# Altium PCB EJ1Mealy.PcbDoc
Units mm, origin at the board's own origin, x right, y up, seen from the top; angles counter-clockwise.
Board outline 100 x 100 mm, 2 copper layers (Top Layer, Bottom Layer); 20 components, 21 nets, 144 pads, 40 vias.
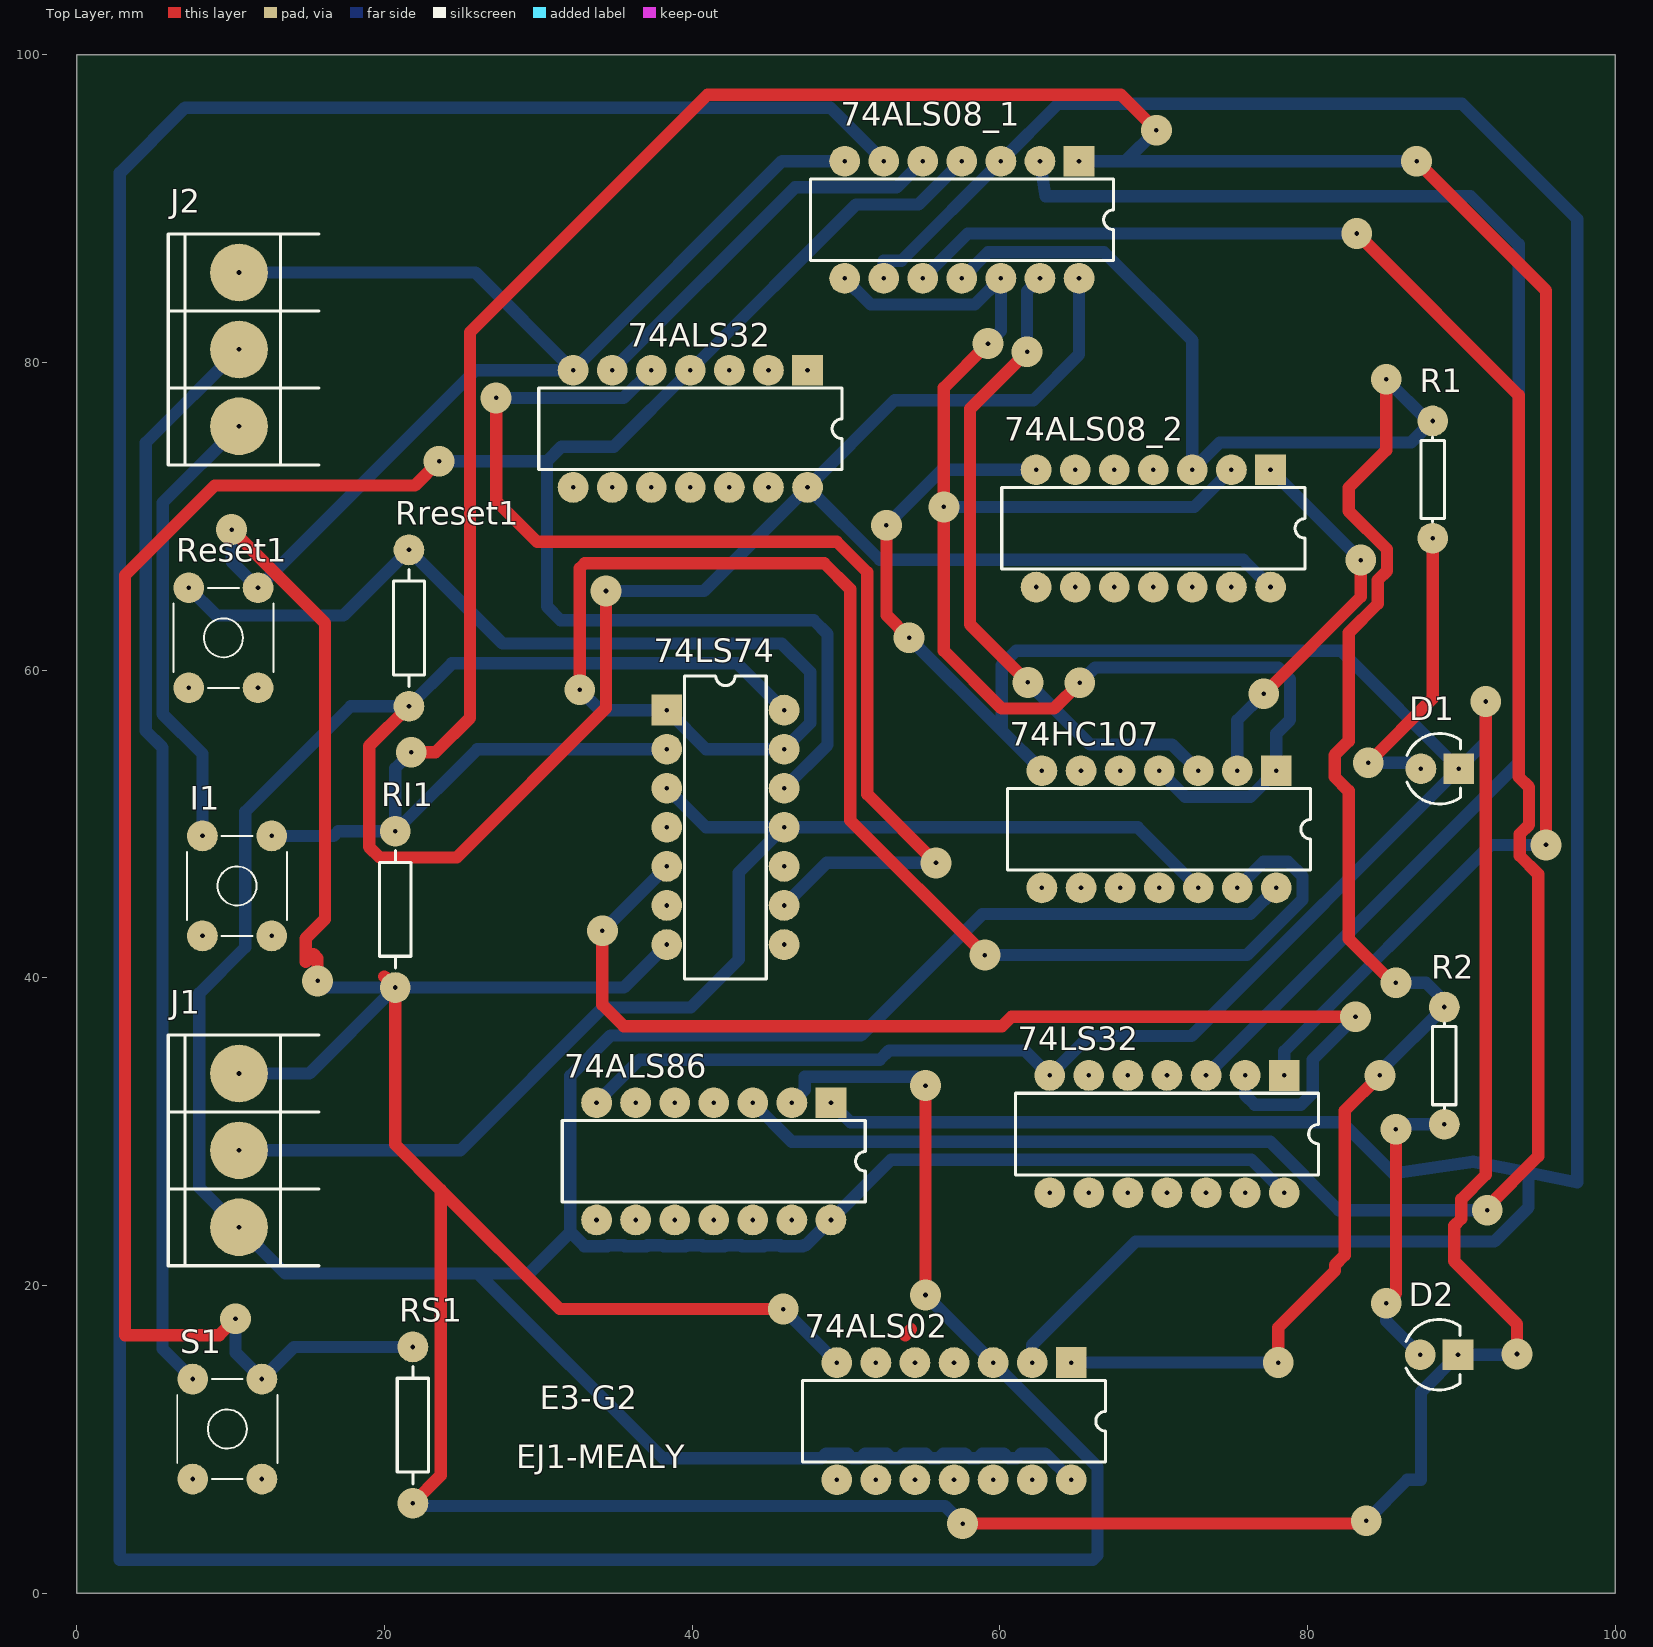
[diagram p0: Top Layer view]
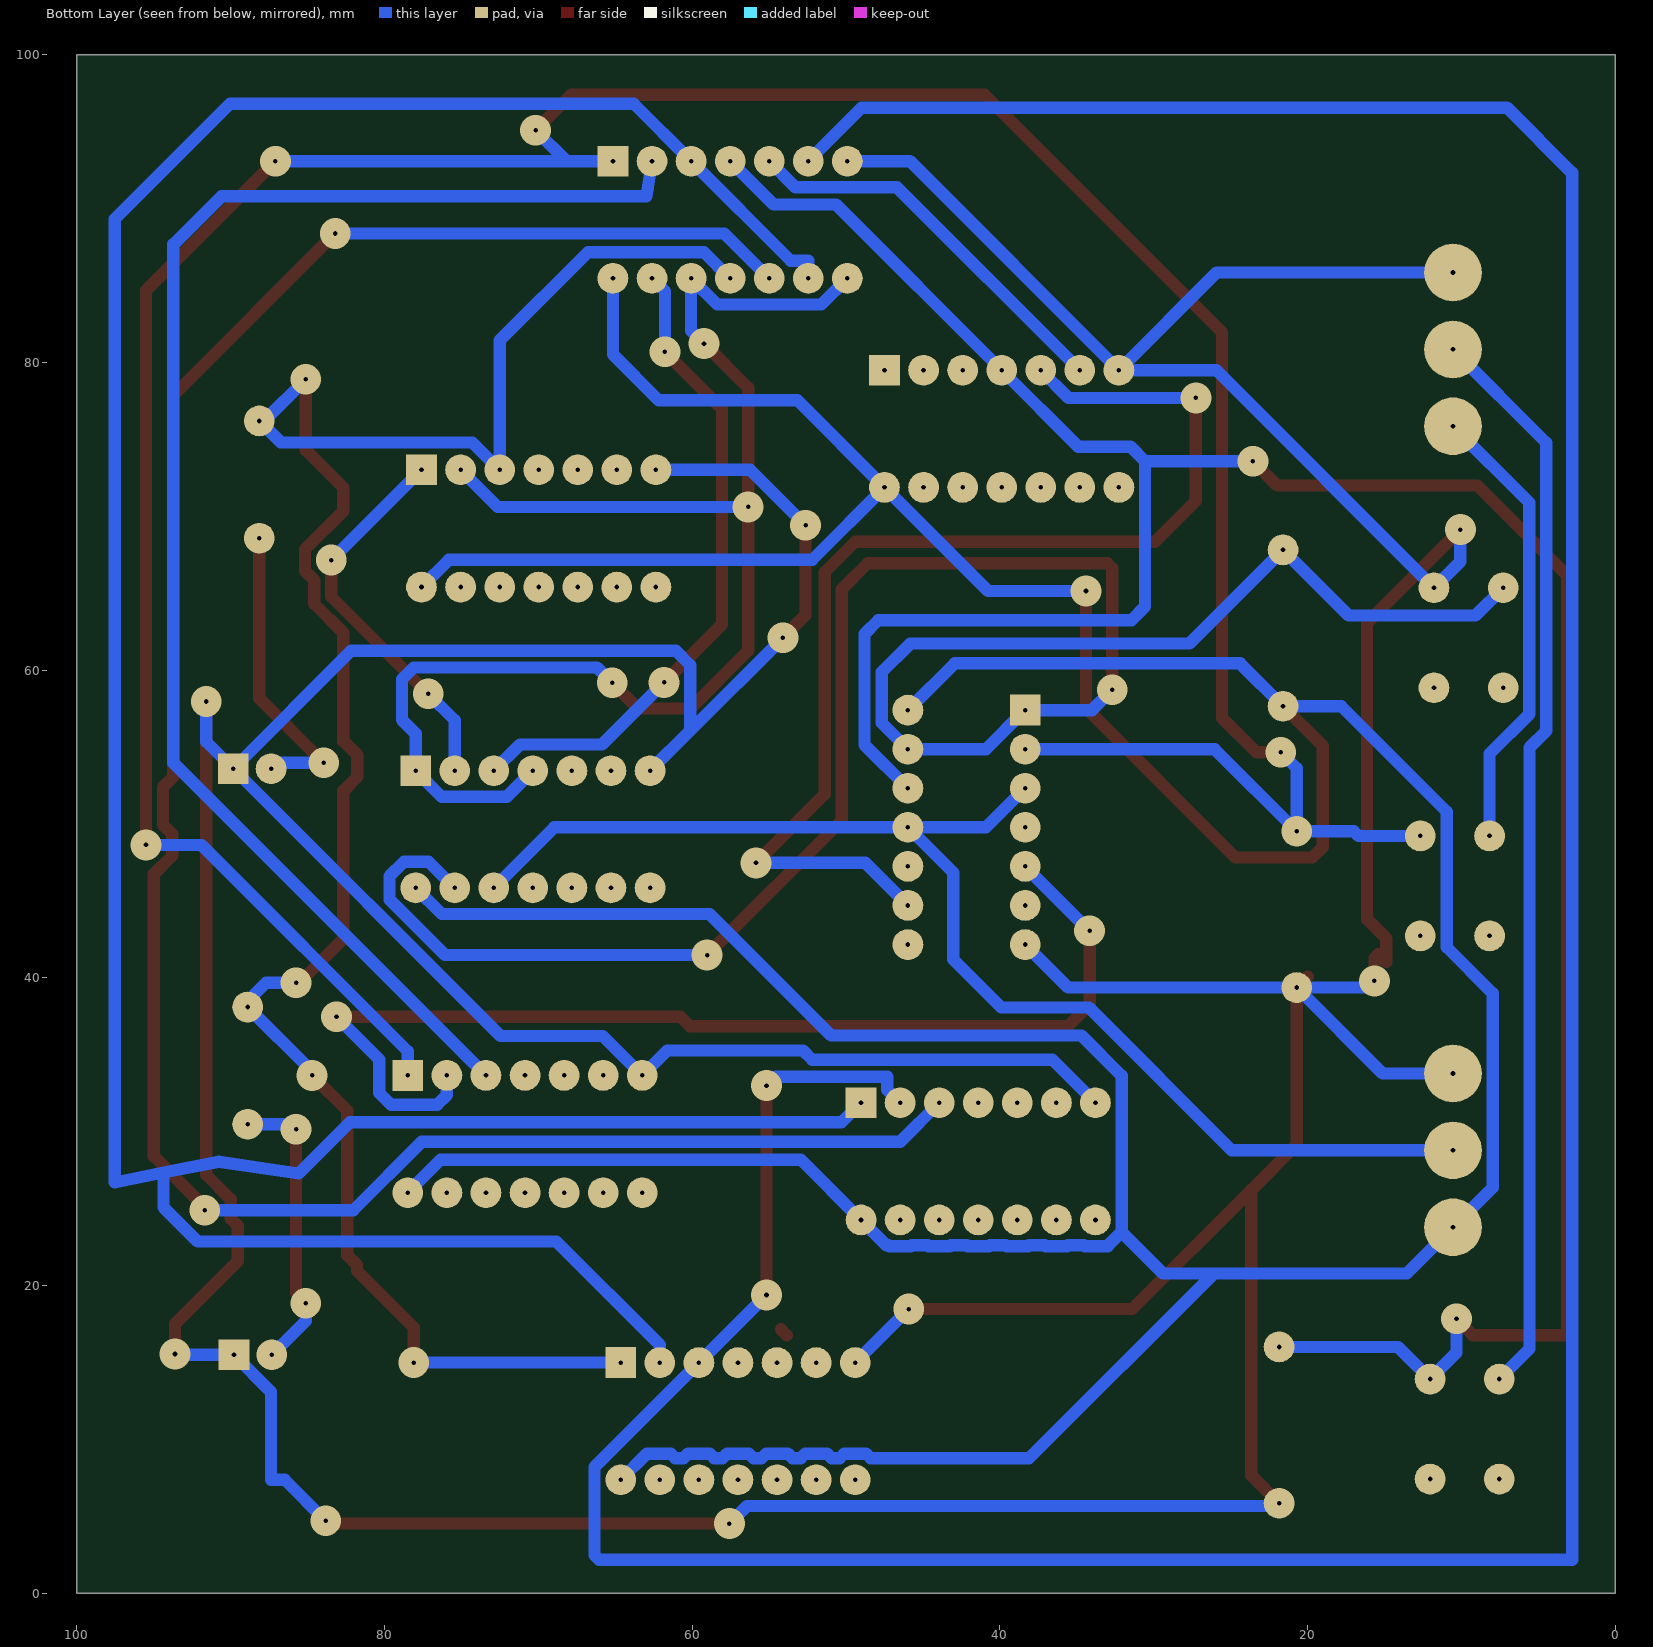
[diagram p1: Bottom Layer view, seen from below]
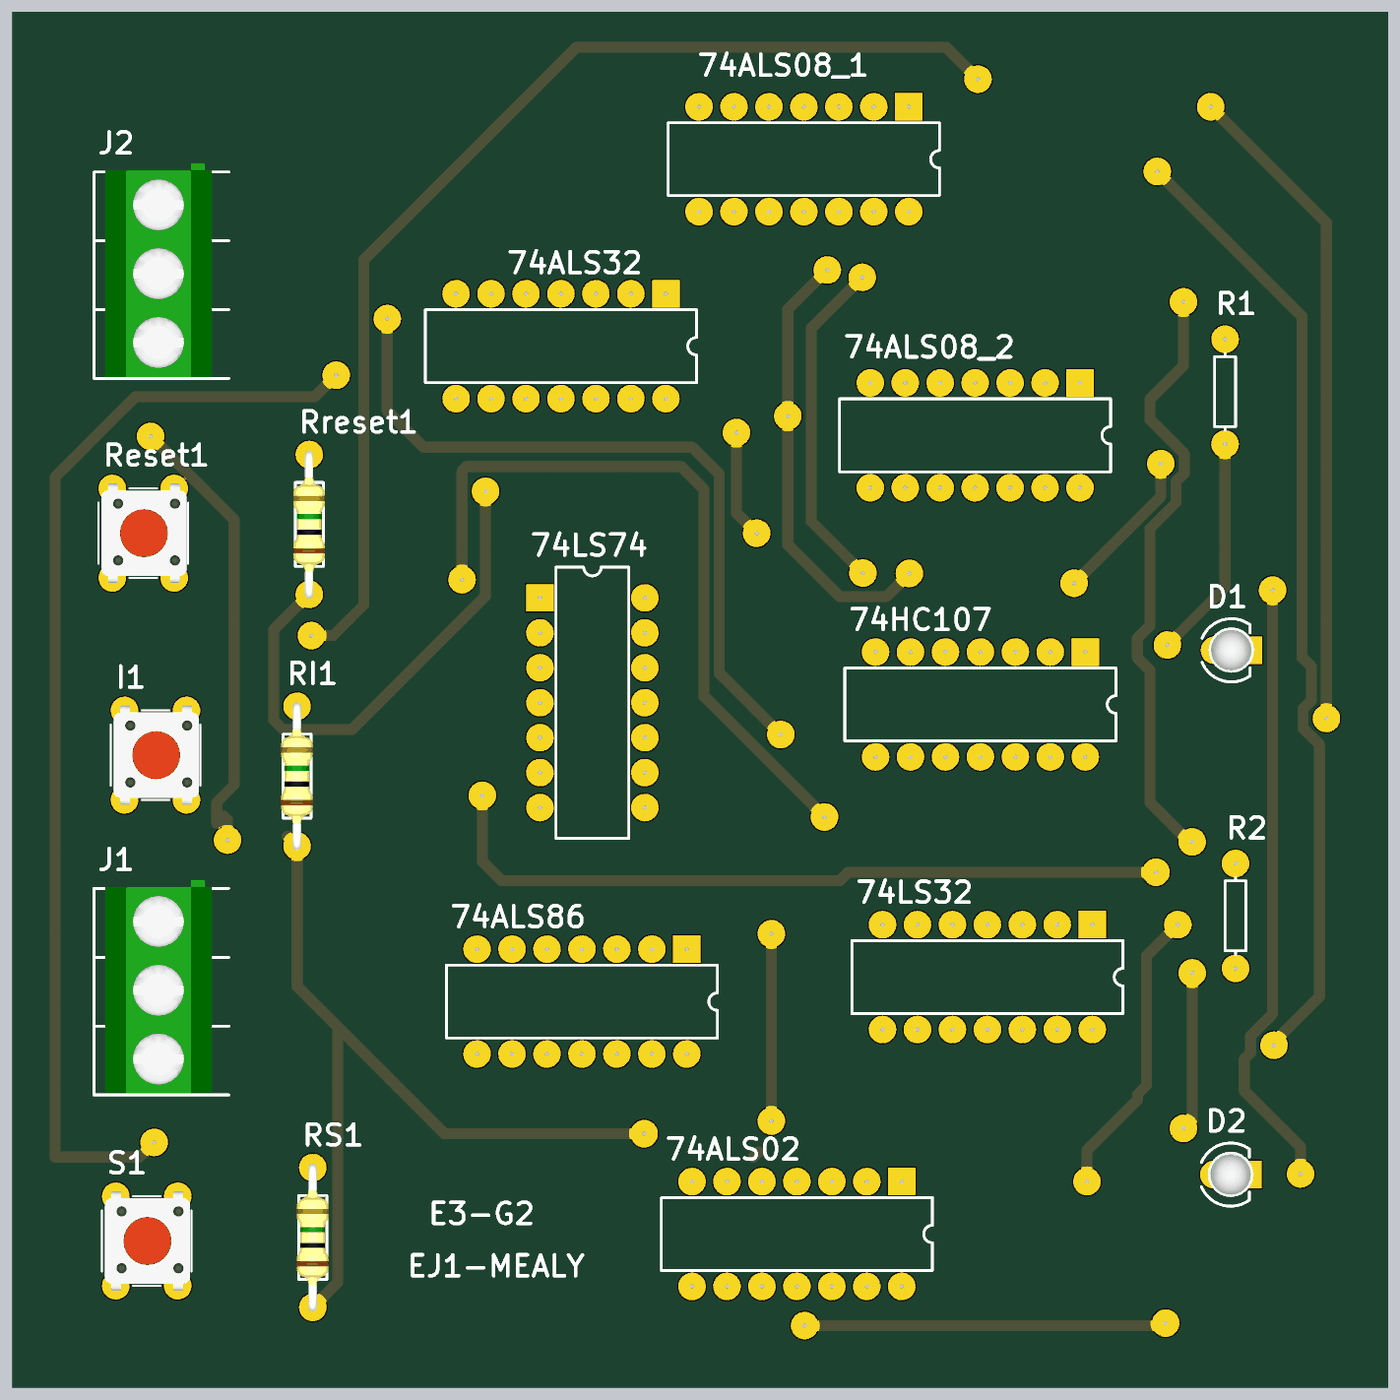
[diagram p2: 3D render of the assembled board from above, using the file's embedded part models]

## Layer stack, top to bottom
Top Solder: solder mask 0.0102, Solder Resist, Dk 3.5
Top Layer: signal copper 0.0356
Dielectric 1: dielectric 0.32, FR-4, Dk 4.8
Bottom Layer: signal copper 0.0356
Bottom Solder: solder mask 0.0102, Solder Resist, Dk 3.5

## Board outline
100,100 0,100 0,0 100,0

## Design rules (kind name [scope] priority, off if disabled: settings)
Clearance [All] p1: gap=0.3 ignorepadtopadclearanceinfootprint=FALSE
PolygonConnect [All] p1: connectstyle=Relief reliefconductorwidth=0.254 reliefentries=4 polygonreliefangle="90 Angle" airgapwidth=0.254
RoutingVias [All] p1: holewidth=0.3 width=2 viastyle="Through Hole" minholewidth=0.3 minwidth=2 maxholewidth=0.3 maxwidth=2
SolderMaskExpansion [All] p1: expansion=0.102
Width [All] p1: maxlimit=1 minlimit=0.5 preferedwidth=0.8
30 further rules are at their usual default settings.

## Classes and differential pairs
component class EJ1Mealy: 74ALS08_2 74ALS32 74HC107 74LS32 74LS74 D1 D2 I1 J1 J2 R1 R2 Reset1 RI1 Rreset1 RS1 S1

## Components (designator, comment, footprint, x,y, rotation, side; value= is the part's Value field where it differs from the comment)
74ALS02 "SN74ALS02AN" N014 57.023,11.176 r180 top
74ALS08_1 "SN74ALS08N" N014 57.531,89.281 r180 top
74ALS08_2 "SN74ALS08N" N014 69.977,69.215 r180 top
74ALS32 "SN74ALS32N" N014 39.878,75.692 r180 top
74ALS86 "SN74ALS86N" N014 41.402,28.067 r180 top
74HC107 "SN74HC107N" N014D 70.358,49.657 r180 top
74LS32 "SN74ALS32N" N014 70.866,29.845 r180 top
74LS74 "SN74ALS74AN" N014 42.164,49.784 r270 top
D1 "LED" LED3 88.595,53.594 r0 top
D2 "LED" LED3 88.544,15.494 r0 top
I1 "BUTTON" TACTSWITCH 10.414,45.974 r0 top
J1 "BORNERA 3" BORNERA3 10.541,28.782 r0 top
J2 "BORNERA 3" BORNERA3 10.541,80.852 r0 top
R1 "Res1" AXIAL-0.3 88.138,72.39 r270 top value=220
R2 "Res1" AXIAL-0.3 88.9,34.29 r270 top value=220
Reset1 "BUTTON" TACTSWITCH 9.525,62.103 r0 top
RI1 "10k" RES400 20.701,39.37 r90 top
Rreset1 "10k" RES400 21.59,57.658 r90 top
RS1 "10k" RES400 21.844,5.842 r90 top
S1 "BUTTON" TACTSWITCH 9.779,10.668 r0 top

## Footprints (in the part's own frame and the unit in brackets; to place one, negate y for a bottom-side part, rotate by r counter-clockwise, add the part's x,y. Pads: shape width x height; smd on the part's side, far side on the other; paste and mask are expansions set on the pad)
AXIAL-0.3 [mm] "Axial Device, Thru-Hole; 2 Leads; 0.3 in Pin Spacing"
  round 2 hole 0.3: 1(-3.81,0) 2(3.81,0)
  silkscreen extent -2.77,-0.76 2.77,0.76
BORNERA3 [mm] "Bornera con Tornillos 5mm separación"
  round 3.75 hole 0.3: 1(0,5) 2(0,0) 3(0,-5)
  silkscreen extent -4.6,-7.5 5.2,7.5, body extent -3.76,-7.39 3.94,8.11, height 10.05
LED3 [mm]
  round 2 hole 0.3: 1(-1.219,0)
  rect 2x2 hole 0.3: 2(1.245,0)
  silkscreen extent -2.13,-2.3 1.36,2.3, body extent -1.65,-1.63 1.65,1.66, height 0.49
N014 [mm] "DIP; 14 Leads; Row Spacing 7.62 mm; Pitch 2.54 mm"
  rect 2x2 hole 0.3: 1(-7.62,-3.81)
  round 2 hole 0.3: 2(-5.08,-3.81) 3(-2.54,-3.81) 4(0,-3.81) 5(2.54,-3.81) 6(5.08,-3.81) 7(7.62,-3.81) 8(7.62,3.81) 9(5.08,3.81) 10(2.54,3.81) 11(0,3.81) 12(-2.54,3.81) 13(-5.08,3.81) 14(-7.62,3.81)
  silkscreen extent -9.85,-2.65 9.85,2.65
N014D [mm] "DIP; 14 Leads; Row Spacing 7.62 mm; Pitch 2.54 mm"
  rect 2x2 hole 0.3: 1(-7.62,-3.81)
  round 2 hole 0.3: 2(-5.08,-3.81) 3(-2.54,-3.81) 4(0,-3.81) 5(2.54,-3.81) 6(5.08,-3.81) 7(7.62,-3.81) 8(7.62,3.81) 9(5.08,3.81) 10(2.54,3.81) 11(0,3.81) 12(-2.54,3.81) 13(-5.08,3.81) 14(-7.62,3.81)
  silkscreen extent -9.85,-2.65 9.85,2.65
RES400 [mm]
  round 2 hole 0.3: 1(0,0) 2(10.16,0)
  silkscreen extent 1.27,-1.02 8.89,1.02, body extent -0.3,-1.14 10.46,1.17, height 2.43
TACTSWITCH [mm]
  round 2 hole 0.3: 1(-2.25,-3.25) 2(-2.25,3.25) 3(2.25,-3.25) 4(2.25,3.25)
  silkscreen extent -3.25,-3.25 3.25,3.25, body extent -3.05,-3.95 3.15,3.95, height 7

## Part data
74ALS02: "Quadruple 2-Input Positive-NOR Gate", ComponentLink1Description="Manufacturer Link", ComponentLink1URL=http://www.ti.com/, ComponentLink2Description=Datasheet, ComponentLink2URL=http://www-s.ti.com/sc/ds/sn74als02a.pdf, ComponentLink3Description="Packaging Specification", ComponentLink3URL=http://focus.ti.com/lit/ml/mpdi002c/mpdi002c.pdf, DatasheetVersion=Dec-1994, LatestRevisionDate=04-Mar-2005, LatestRevisionNote="Stylized 3D Model Added.", PackageDescription="DIP; 14 Leads; Row Spacing 7.62 mm; Pitch 2.54 mm", PackageReference=N014, PackageVersion=Oct-1995, Published=8-Jun-2000, Publisher="Altium Limited"
74ALS08_1 74ALS08_2: "Quadruple 2-Input Positive-AND Gate", ComponentLink1Description="Manufacturer Link", ComponentLink1URL=http://www.ti.com/, ComponentLink2Description=Datasheet, ComponentLink2URL=http://www-s.ti.com/sc/ds/sn74als08.pdf, ComponentLink3Description="Packaging Specification", ComponentLink3URL=http://focus.ti.com/lit/ml/mpdi002c/mpdi002c.pdf, DatasheetVersion=Dec-1994, LatestRevisionDate=04-Mar-2005, LatestRevisionNote="Stylized 3D Model Added.", PackageDescription="DIP; 14 Leads; Row Spacing 7.62 mm; Pitch 2.54 mm", PackageReference=N014, PackageVersion=Oct-1995, Published=8-Jun-2000, Publisher="Altium Limited"
74ALS32 74LS32: "Quadruple 2-Input Positive-OR Gate", ComponentLink1Description="Manufacturer Link", ComponentLink1URL=http://www.ti.com/, ComponentLink2Description=Datasheet, ComponentLink2URL=http://www-s.ti.com/sc/ds/sn74als32.pdf, ComponentLink3Description="Packaging Specification", ComponentLink3URL=http://focus.ti.com/lit/ml/mpdi002c/mpdi002c.pdf, DatasheetVersion=Dec-1994, LatestRevisionDate=04-Mar-2005, LatestRevisionNote="Stylized 3D Model Added.", PackageDescription="DIP; 14 Leads; Row Spacing 7.62 mm; Pitch 2.54 mm", PackageReference=N014, PackageVersion=Oct-1995, Published=8-Jun-2000, Publisher="Altium Limited"
74ALS86: "Quadruple 2-Input Exclusive-OR Gate", ComponentLink1Description="Manufacturer Link", ComponentLink1URL=http://www.ti.com/, ComponentLink2Description=Datasheet, ComponentLink2URL=http://www-s.ti.com/sc/ds/sn54als86.pdf, ComponentLink3Description="Packaging Specification", ComponentLink3URL=http://focus.ti.com/lit/ml/mpdi002c/mpdi002c.pdf, DatasheetVersion=Dec-1994, LatestRevisionDate=04-Mar-2005, LatestRevisionNote="Stylized 3D Model Added.", PackageDescription="DIP; 14 Leads; Row Spacing 7.62 mm; Pitch 2.54 mm", PackageReference=N014, PackageVersion=Oct-1995, Published=8-Jun-2000, Publisher="Altium Limited"
74HC107: "Dual J-K Negative-Edge-Triggered Flip-Flop with Clear", ComponentLink1Description="Manufacturer Link", ComponentLink1URL=http://www.ti.com/, DatasheetVersion=Jun-1989, LatestRevisionDate=04-Mar-2005, LatestRevisionNote="Stylized 3D Model Added.", PackageDescription="DIP; 14 Leads; Row Spacing 7.62 mm; Pitch 2.54 mm", PackageReference=N014D, PackageVersion=Oct-1995, Published=8-Jun-2000, Publisher="Altium Limited"
74LS74: "Dual Positive-Edge-Triggered D-Type Flip-Flop with Clear and Preset", ComponentLink1Description="Manufacturer Link", ComponentLink1URL=http://www.ti.com/, ComponentLink2Description=Datasheet, ComponentLink2URL=http://www-s.ti.com/sc/ds/sn74als74a.pdf, DatasheetVersion=Aug-1995, LatestRevisionDate=04-Mar-2005, LatestRevisionNote="Stylized 3D Model Added.", PackageDescription="DIP; 14 Leads; Row Spacing 7.62 mm; Pitch 2.54 mm", PackageReference=N014, PackageVersion=Oct-1995, Published=8-Jun-2000, Publisher="Altium Limited"
I1 Reset1 S1: library part "TACT SWITCH"
R1 R2: "Resistor", LatestRevisionDate=17-Jul-2002, LatestRevisionNote="Re-released for DXP Platform.", PackageDescription="Axial Device, Thru-Hole; 2 Leads; 0.3 in Pin Spacing", PackageReference=AXIAL-0.3, Published=8-Jun-2000, Publisher="Altium Limited"
RI1 Rreset1 RS1: library part RES

## Via types
v1: diameter 2, hole 0.3, Top Layer to Bottom Layer, 40 vias

## Nets (pads, with @x,y where several pads share a name; then routed paths per layer and width w, separated by ;. In a path a pad name is that pad's centre, name@x,y a point inside that pad or via, vN(x,y) a via of type N, cw(c..) or ccw(c..) an arc to the next point about the centre after c; other vN are vias at no path point)
B1: 74ALS02.1 74ALS08_1.11 74ALS08_2.3 R1.1 R2.1 | length 137.5
  Top Layer w0.8: v1(78.105,14.986) 78.105,17.272 81.788,20.955 81.788,21.336 82.423,21.971 82.423,31.369 v1(84.709,33.655) ; v1(85.115,78.918) 85.115,74.295 82.677,71.857 82.677,70.349 85.164,67.862 85.164,66.453 84.564,65.853 84.564,64.314 82.677,62.427 82.677,55.389 81.764,54.476 81.764,53.068 82.677,52.155 82.677,42.545 v1@85.674,39.548
  Bottom Layer w0.8: 74ALS08_1.11 59.233,87.173 66.777,87.173 72.517,81.432 74ALS08_2.3 74.295,74.803 86.741,74.803 R1.1 87.833,76.2 v1(85.115,78.918) ; 74ALS02.1 v1(78.105,14.986) ; v1@84.709,33.909 v1(84.709,33.655) 84.824,33.77 84.824,34.024 R2.1 89.09,38.291 87.706,39.675 v1(85.75,39.675)
CLK: 74HC107.12 74LS74.3 74LS74.11 J1.2 | length 84.7
  Bottom Layer w0.8: J1.2 24.921,28.782 34.214,38.075 39.903,38.075 43.028,41.199 43.028,46.838 74LS74.11 ; 74LS74.3 40.894,49.784 74LS74.11 ; 74HC107.12 68.961,49.784 74LS74.11
GND: 74ALS02.7 74ALS08_1.7 74ALS08_2.7 74ALS32.7 74ALS86.7 74HC107.7 74LS32.7 74LS74.7 D1.2 D2.2 J1.1 J2.1 Reset1.4 RI1.1 RS1.1 | length 481.3
  Top Layer w0.8: v1(10.058,69.139) 16.129,63.068 16.129,43.815 14.871,42.557 14.871,41.033 15.38,41.542 15.646,41.275 v1(15.646,39.802) ; 19.99,40.081 RI1.1 20.701,29.159 23.647,26.213 ; RS1.1 23.647,7.645 23.647,26.213 ; v1(45.923,18.466) 31.394,18.466 23.647,26.213 ; v1(52.629,69.418) 52.629,63.576 v1(54.102,62.103) ; v1(57.582,4.521) 83.642,4.521 v1(83.82,4.699) ; v1(91.592,57.963) 91.592,27.195 89.994,25.596 89.994,24.335 89.535,23.876 89.535,21.59 93.624,17.501 v1(93.624,15.545)
  Bottom Layer w0.8: v1(10.058,69.139) 10.058,67.07 Reset1.4 25.924,79.502 74ALS32.7 ; J1.1 15.113,33.782 RI1.1 ; J2.1 25.908,85.852 74ALS32.7 ; v1(15.646,39.802) 16.078,39.37 RI1.1 ; RS1.1 21.844,5.666 56.437,5.666 v1(57.582,4.521) ; 74ALS86.7 36.582,34.677 52.197,34.677 52.797,35.277 61.624,35.277 74LS32.7 65.811,36.22 72.466,36.22 D1.2 ; 74LS74.7 35.56,39.37 RI1.1 ; v1(45.923,18.466) 74ALS02.7 ; 74ALS08_1.7 45.847,93.091 74ALS32.7 ; v1(52.629,69.418) 56.236,73.025 74ALS08_2.7 ; v1(54.102,62.103) 60.122,56.083 ; 74HC107.7 60.122,56.083 ; v1(83.82,4.699) 86.487,7.366 87.376,7.366 87.376,13.081 D2.2 93.574,15.494 v1(93.624,15.545) ; v1(91.592,57.963) 91.592,55.347 D1.2 ; 60.122,56.083 60.122,60.325 61.068,61.271 82.163,61.271 D1.2
Net74ALS08_1_2: 74ALS08_1.2 74LS32.3 | length 96.8
  Bottom Layer w0.8: 74ALS08_1.2 62.967,90.805 90.602,90.805 93.726,87.681 93.726,53.975 74LS32.3
Net74ALS08_1_5: 74ALS08_1.5 74ALS32.6 | length 25.8
  Bottom Layer w0.8: 74ALS32.6 46.685,91.389 53.289,91.389 74ALS08_1.5
Net74ALS08_1_8: 74ALS08_1.8 74ALS08_1.12 74ALS08_2.2 74HC107.1 74HC107.4 | length 97.8
  Top Layer w0.8: v1(59.233,81.229) 56.363,78.359 v1(56.363,70.612) 56.363,61.263 60.12,57.506 63.525,57.506 v1(65.202,59.182)
  Bottom Layer w0.8: 74ALS08_1.8 51.613,83.769 58.369,83.769 74ALS08_1.12 60.071,82.067 v1(59.233,81.229) ; v1(56.363,70.612) 72.644,70.612 74ALS08_2.2 ; v1(65.202,59.182) 66.191,60.171 78.105,60.171 78.867,59.409 78.867,56.769 77.978,55.88 74HC107.1 76.276,51.765 72.06,51.765 74HC107.4
Net74ALS08_1_10: 74ALS08_1.10 74ALS86.3 | length 150.3
  Top Layer w0.8: v1(83.21,88.392) 93.726,77.876 93.726,53.075 94.404,52.397 94.404,49.945 93.804,49.345 93.804,47.937 94.996,46.745 94.996,28.397 91.694,25.095 v1(91.694,24.892)
  Bottom Layer w0.8: 74ALS86.3 46.482,29.337 77.588,29.337 82.033,24.892 v1(91.694,24.892) ; 74ALS08_1.10 57.912,88.392 v1(83.21,88.392)
Net74ALS08_1_13: 74ALS08_1.13 74HC107.3 | length 43.2
  Top Layer w0.8: v1(61.773,80.696) 58.064,76.987 58.064,62.967 v1(61.824,59.207)
  Bottom Layer w0.8: v1(61.773,80.696) 61.773,84.633 74ALS08_1.13 ; v1(61.824,59.207) 65.862,55.169 71.196,55.169 74HC107.3
Net74ALS08_2_1: 74ALS08_2.1 74HC107.2 | length 25.3
  Top Layer w0.8: v1(77.165,58.471) 83.464,64.77 v1(83.464,67.158)
  Bottom Layer w0.8: 74HC107.2 75.438,56.744 v1(77.165,58.471) ; 74ALS08_2.1 v1(83.464,67.158)
Net74ALS32_5: 74ALS32.5 74LS74.9 | length 75.3
  Top Layer w0.8: v1(27.254,77.699) 27.254,71.018 29.921,68.351 49.403,68.351 51.384,66.37 51.384,51.943 v1(55.855,47.473)
  Bottom Layer w0.8: v1(27.254,77.699) 35.535,77.699 74ALS32.5 ; 74LS74.9 48.743,47.473 v1(55.855,47.473)
Net74LS32_2: 74LS32.2 74LS74.5 | length 72.9
  Top Layer w0.8: v1(34.163,43.053) 34.163,38.252 35.56,36.855 60.147,36.855 60.757,37.465 v1(83.124,37.465)
  Bottom Layer w0.8: v1(34.163,43.053) 74LS74.5 ; 74LS32.2 75.946,32.385 76.581,31.75 79.571,31.75 80.342,32.521 80.342,34.683 v1(83.124,37.465)
NetD1_1: D1.1 R1.2 | length 19.9
  Top Layer w0.8: v1(83.947,53.975) 88.138,58.166 R1.2
  Bottom Layer w0.8: v1(83.947,53.975) 86.995,53.975 D1.1
NetD2_1: D2.1 R2.2 | length 19.1
  Top Layer w0.8: v1(85.115,18.847) 85.75,19.482 v1(85.75,30.15)
  Bottom Layer w0.8: v1(85.115,18.847) 85.115,17.704 D2.1 ; v1(85.75,30.15) 86.081,30.48 R2.2
nReset: 74HC107.13 74LS74.1 74LS74.13 Reset1.2 Rreset1.2 | length 149.5
  Top Layer w0.8: v1(32.69,58.725) 32.69,66.624 33.02,66.954 48.59,66.954 50.267,65.278 50.267,50.241 v1(59.03,41.478)
  Bottom Layer w0.8: Reset1.2 9.077,63.551 17.323,63.551 Rreset1.2 27.672,61.736 45.815,61.736 47.676,59.875 47.676,56.566 74LS74.13 40.894,54.864 74LS74.1 34.011,57.404 v1(32.69,58.725) ; v1(59.03,41.478) 76.073,41.478 79.68,45.085 79.68,46.609 78.74,47.549 77.14,47.549 74HC107.13
V1: I1.2 J2.3 | length 29.8
  Bottom Layer w0.8: I1.2 8.164,54.564 5.575,57.153 5.575,70.886 J2.3
V2: J2.2 S1.2 | length 70.7
  Bottom Layer w0.8: S1.2 5.563,15.884 5.563,54.965 4.475,56.053 4.475,74.786 J2.2
VCC: 74ALS02.14 74ALS08_1.14 74ALS08_2.14 74ALS32.14 74ALS86.14 74HC107.14 74LS32.14 74LS74.14 J1.3 Rreset1.1 | length 362.8
  Top Layer w0.8: Rreset1.1 18.999,55.067 18.999,48.514 19.685,47.828 24.693,47.828 34.396,57.531 v1(34.396,65.147)
  Bottom Layer w0.8: v1(34.396,65.147) 40.763,65.147 74ALS32.14 ; 74LS74.14 42.935,60.443 24.375,60.443 Rreset1.1 17.805,57.658 10.947,50.8 10.947,41.986 7.95,38.989 7.95,26.373 J1.3 13.546,20.777 26.086,20.777 ; 74ALS02.14 62.943,9.066 61.399,9.066 61.096,8.763 60.57,8.763 60.267,9.066 58.859,9.066 58.556,8.763 58.03,8.763 57.727,9.066 56.319,9.066 56.016,8.763 55.49,8.763 55.187,9.066 53.779,9.066 53.476,8.763 52.95,8.763 52.647,9.066 51.239,9.066 50.936,8.763 50.41,8.763 50.107,9.066 48.699,9.066 48.396,8.763 38.1,8.763 26.086,20.777 ; 74ALS08_1.14 65.151,80.518 62.179,77.546 53.162,77.546 74ALS32.14 ; 74ALS08_2.14 75.819,67.183 52.197,67.183 74ALS32.14 ; 74HC107.14 76.278,44.147 58.867,44.147 50.966,36.246 34.696,36.246 32.08,33.63 32.08,23.47 ; 74LS32.14 76.351,28.17 52.935,28.17 74ALS86.14 47.371,22.606 47.235,22.606 47.186,22.557 45.778,22.557 45.729,22.606 44.695,22.606 44.646,22.557 43.238,22.557 43.189,22.606 42.155,22.606 42.106,22.557 40.698,22.557 40.649,22.606 39.615,22.606 39.566,22.557 38.158,22.557 38.109,22.606 37.075,22.606 37.026,22.557 35.618,22.557 35.569,22.606 34.535,22.606 34.486,22.557 32.993,22.557 32.08,23.47 ; 26.086,20.777 29.388,20.777 32.08,23.47
W1: 74ALS08_1.1 74LS32.1 74LS74.2 I1.4 RI1.2 | length 212.2
  Top Layer w0.8: v1(21.742,54.661) 23.319,54.661 25.554,56.896 25.554,81.968 40.996,97.409 67.869,97.409 v1(70.18,95.098) ; v1(87.097,93.091) 95.504,84.684 v1(95.504,48.641)
  Bottom Layer w0.8: I1.4 16.688,49.224 16.994,49.53 RI1.2 ; v1(21.742,54.661) 20.701,53.619 RI1.2 ; 74LS74.2 26.035,54.864 RI1.2 ; 74ALS08_1.1 68.174,93.091 ; v1(70.18,95.098) 68.174,93.091 ; 74LS32.1 78.486,35.231 91.896,48.641 v1(95.504,48.641) ; v1(87.097,93.091) 68.174,93.091
W2: 74ALS08_1.4 74ALS32.4 74LS74.12 RS1.2 S1.4 | length 177.5
  Top Layer w0.8: v1(10.312,17.831) 9.246,16.764 3.124,16.764 3.124,66.167 8.966,72.009 21.971,72.009 v1(23.546,73.584)
  Bottom Layer w0.8: v1(10.312,17.831) 10.312,15.635 S1.4 14.113,16.002 RS1.2 ; v1(23.546,73.584) 30.556,73.584 ; 74LS74.12 48.793,55.143 48.793,62.357 47.904,63.246 31.445,63.246 30.556,64.135 30.556,73.584 ; 74ALS08_1.4 54.712,90.272 50.648,90.272 74ALS32.4 34.91,74.534 31.507,74.534 30.556,73.584
Z1: 74ALS02.2 74ALS08_1.3 74ALS08_1.9 74ALS86.1 | length 206.2
  Bottom Layer w0.8: 74ALS86.1 50.292,30.607 82.245,30.607 85.573,27.28 90.78,28.042 94.37,27.33 ; 74ALS08_1.9 52.451,86.614 53.594,86.614 74ALS08_1.3 63.799,96.819 90.048,96.819 97.536,89.332 97.536,26.703 94.37,27.33 ; 74ALS02.2 62.103,16.129 68.834,22.86 92.151,22.86 94.37,25.079 94.37,27.33
Z2: 74ALS02.3 74ALS08_1.6 74ALS86.2 | length 252
  Top Layer w0.8: v1(55.169,19.38) v1(55.169,32.995)
  Bottom Layer w0.8: 74ALS86.2 47.32,32.715 47.32,33.577 54.586,33.577 v1(55.169,32.995) ; 74ALS08_1.6 48.971,96.571 7.036,96.571 2.794,92.329 2.794,2.159 66.04,2.159 66.345,2.464 66.345,8.204 74ALS02.3 v1(55.169,19.38)
pads on no net: 74ALS02.4 74ALS02.5 74ALS02.6 74ALS02.8 74ALS02.9 74ALS02.10 74ALS02.11 74ALS02.12 74ALS02.13 74ALS08_2.4 74ALS08_2.5 74ALS08_2.6 74ALS08_2.8 74ALS08_2.9 74ALS08_2.10 74ALS08_2.11 74ALS08_2.12 74ALS08_2.13 74ALS32.1 74ALS32.2 74ALS32.3 74ALS32.8 74ALS32.9 74ALS32.10 74ALS32.11 74ALS32.12 74ALS32.13 74ALS86.4 74ALS86.5 74ALS86.6 74ALS86.8 74ALS86.9 74ALS86.10 74ALS86.11 74ALS86.12 74ALS86.13 74HC107.5 74HC107.6 74HC107.8 74HC107.9 74HC107.10 74HC107.11 74LS32.4 74LS32.5 74LS32.6 74LS32.8 74LS32.9 74LS32.10 74LS32.11 74LS32.12 74LS32.13 74LS74.4 74LS74.6 74LS74.8 74LS74.10 I1.1 I1.3 Reset1.1 Reset1.3 S1.1 S1.3
copper on no net: | length 0.5
  Top Layer w0.8: 53.848,16.764 54.229,17.145

## Silkscreen, mask and mechanical layers (free items; w line width, h text height)
Top Overlay:
  text "E3-G2" at 30.099,11.938 h1.52
  text "EJ1-MEALY" at 28.575,8.128 h1.52